# Altium PCB Altium_v0.6.2.PcbDoc
Units mil, origin at the board's own origin, x right, y up, seen from the top; angles counter-clockwise.
Board outline 1968.5 x 1968.5 mil, 2 copper layers (Top Layer, Bottom Layer); 29 components, 47 nets, 200 pads, 32 vias.
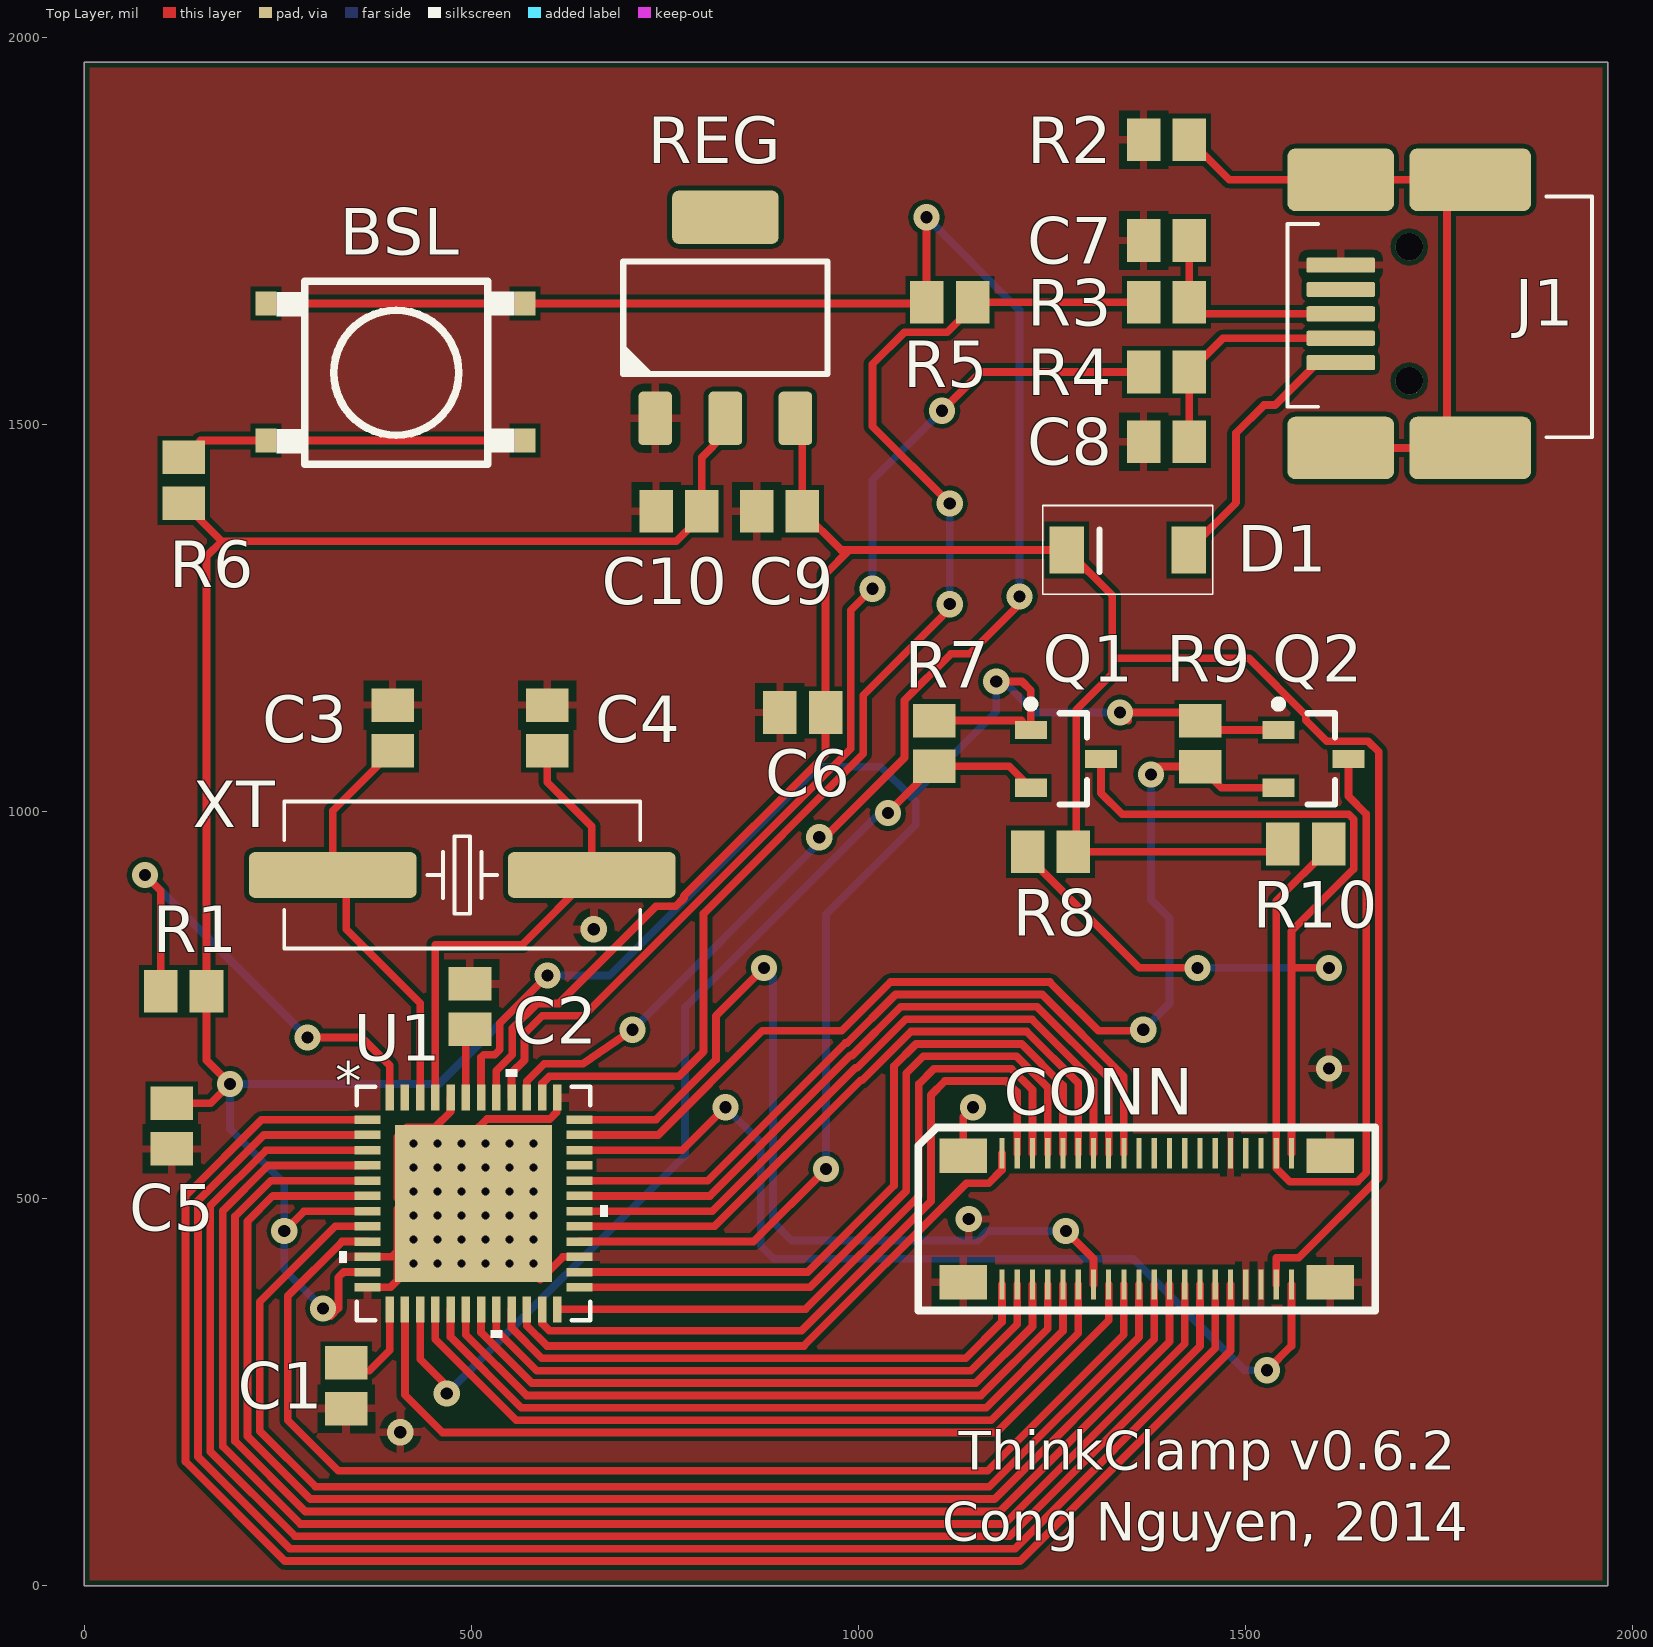
[diagram p0: Top Layer view]
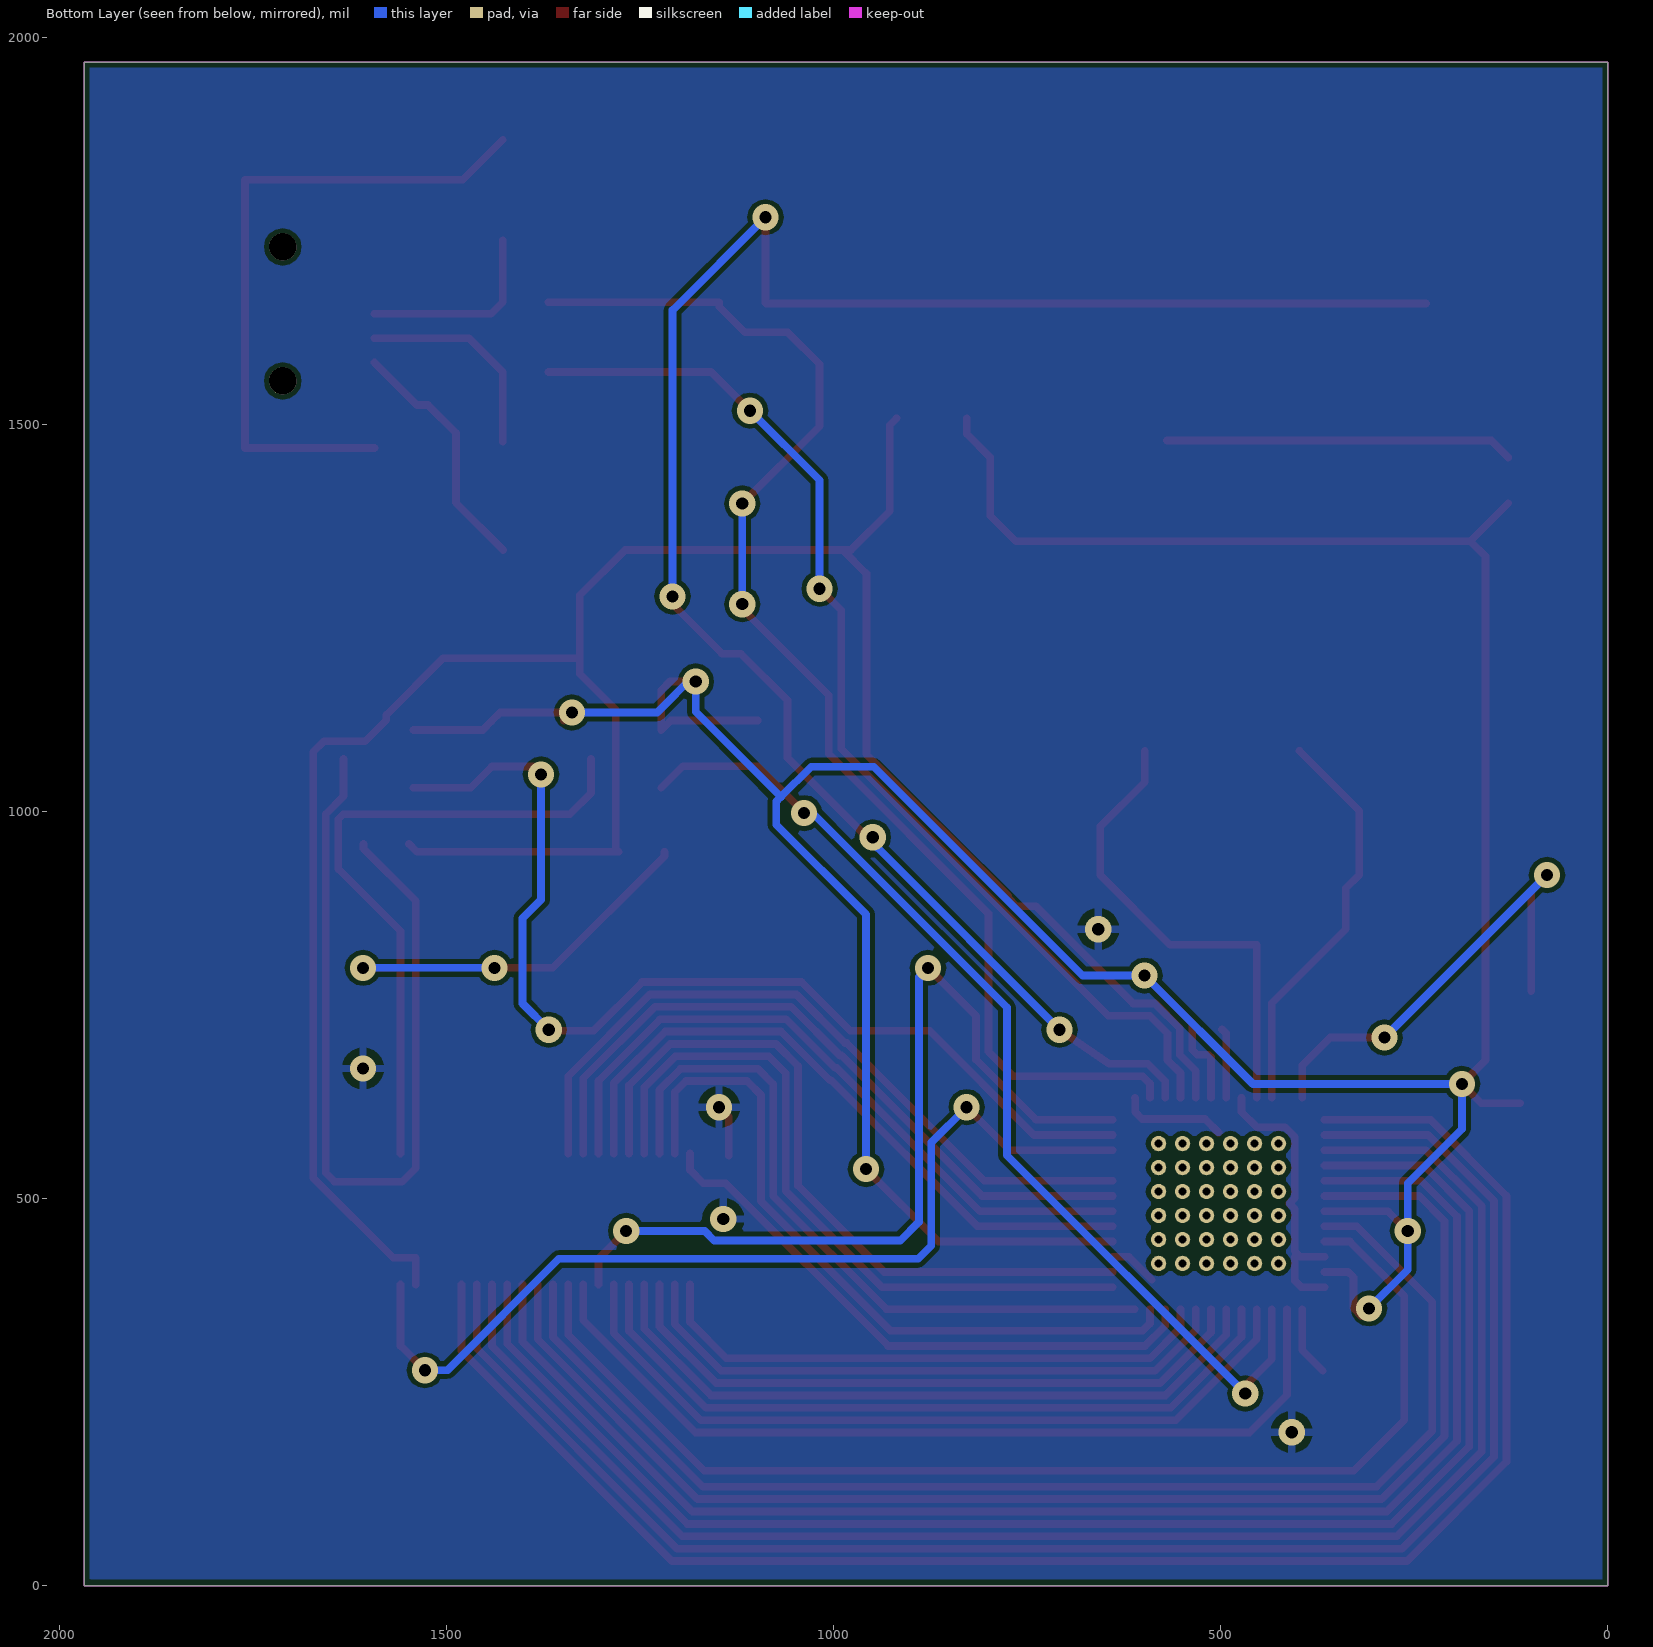
[diagram p1: Bottom Layer view, seen from below]

## Layer stack, top to bottom
Top Layer: signal copper 1.4
Dielectric: dielectric 12.6, FR-4, Dk 4.8
Bottom Layer: signal copper 1.4

## Board outline
0,0 1968.5,0 1968.5,1968.5 0,1968.5 0,0

## Design rules (kind name [scope] priority, off if disabled: settings)
Clearance 5502 [InComponent('U1') vs InComponent('U1')] p1: gap=4
Clearance [All] p2: gap=6
PolygonConnect [All] p1: connectstyle=Relief reliefconductorwidth=10 reliefentries=4 polygonreliefangle="90 Angle" airgapwidth=10
RoutingVias [All] p1: holewidth=28 width=50 viastyle="Through Hole" minholewidth=28 minwidth=50 maxholewidth=28 maxwidth=50
SolderMaskExpansion [All] p1: expansion=4
Width [All] p1: maxlimit=12 minlimit=6 preferedwidth=8
28 further rules are at their usual default settings.

## Components (designator, comment, footprint, x,y, rotation, side; value= is the part's Value field where it differs from the comment)
BSL "TL3301" TL3301 388.35,1568.35 r0 top
C1 "Cap" C0805 338.35,258.35 r270 top
C2 "Cap" C0805 498.35,748.35 r270 top
C3 "Cap" C0805 398.35,1108.35 r270 top
C4 "Cap" C0805 598.35,1108.35 r90 top
C5 "Cap" C0805 112.85,593.85 r90 top
C6 "Cap" C0805 928.35,1128.35 r0 top
C7 "Cap" C0805 1398.35,1738.35 r0 top
C8 "Cap" C0805 1398.35,1478.35 r0 top
C9 "Cap" C0805 898.35,1388.35 r0 top
C10 "Cap" C0805 768.35,1388.35 r0 top
CONN "AA01B-S040VA1" AA01B-S040VA1 1372.85,473.85 r0 top
D1 "B140-13-F" SMA 1348.35,1338.35 r180 top
J1 "USB_MINI_5P" USB_Mini-B_Molex_SMT 1948.35,1838.35 r180 top
Q1 "BSS138N" INF-PG-SOT23_N 1268.35,1068.35 r0 top
Q2 "BSS138N" INF-PG-SOT23_N 1588.35,1068.35 r0 top
R1 "Res1" C0805 128.35,768.35 r0 top
R2 "Res1" C0805 1398.35,1868.35 r180 top
R3 "Res1" C0805 1398.35,1658.35 r0 top
R4 "Res1" C0805 1398.35,1568.35 r0 top
R5 "Res1" C0805 1118.35,1658.35 r0 top
R6 "Res1" C0805 128.35,1428.35 r90 top
R7 "Res1" C0805 1098.35,1088.35 r90 top
R8 "Res1" C0805 1248.35,948.35 r0 top
R9 "Res1" C0805 1441.91,1087.94 r90 top
R10 "Res1" C0805 1578.35,958.35 r180 top
REG "RT9164A LDO" SOT223 828.35,1638.35 r90 top
U1 "MSP430F5502IRGZR" RGZ48_5P15X5P15 502.85,493.85 r0 top
XT "4.00MHz" CRYSTAL_HC49-US-SM 488.35,918.35 r180 top

## Footprints (in the part's own frame and the unit in brackets; to place one, negate y for a bottom-side part, rotate by r counter-clockwise, add the part's x,y. Pads: shape width x height; smd on the part's side, far side on the other; paste and mask are expansions set on the pad)
AA01B-S040VA1 [mm]
  rect 0.17x1 smd: 1(-4.75,2.15) 2(-4.75,-2.15) 3(-4.25,2.15) 4(-4.25,-2.15) 5(-3.75,2.15) 6(-3.75,-2.15) 7(-3.25,2.15) 8(-3.25,-2.15) 9(-2.75,2.15) 10(-2.75,-2.15) 11(-2.25,2.15) 12(-2.25,-2.15) 13(-1.75,2.15) 14(-1.75,-2.15) 15(-1.25,2.15) 16(-1.25,-2.15) 17(-0.75,2.15) 18(-0.75,-2.15) 19(-0.25,2.15) 20(-0.25,-2.15) 21(0.25,2.15) 22(0.25,-2.15) 23(0.75,2.15) 24(0.75,-2.15) 25(1.25,2.15) 26(1.25,-2.15) 27(1.75,2.15) 28(1.75,-2.15) 29(2.25,2.15) 30(2.25,-2.15) 31(2.75,2.15) 32(2.75,-2.15) 33(3.25,2.15) 34(3.25,-2.15) 35(3.75,2.15) 36(3.75,-2.15) 37(4.25,2.15) 38(4.25,-2.15) 39(4.75,2.15) 40(4.75,-2.15)
  rect 1.55x1.14 smd: 41(-6.025,2.075) 42(-6.025,-2.075) 43(6.025,2.075) 44(6.025,-2.075)
  silkscreen extent -7.5,-3 7.5,3
C0805 [mm] "Chip Capacitor, Body 2.0x1.3mm, IPC High Density"
  rect 1.1x1.4 smd: 1(-0.75,0) 2(0.75,0)
  body extent -1.1,-0.72 1.1,0.72, height 1.4
CRYSTAL_HC49-US-SM [mm] "SMD Crystal HC49/US-SM package"
  round 0.508 on Mech15: 0(0,0)
  rrect25% 5.5x1.5 smd: 1(-4.25,0) 2(4.25,0)
  silkscreen extent -5.84,-2.41 5.84,2.41, body extent -6.4,-2.41 6.4,2.42, height 4.29
INF-PG-SOT23_N [mm] "SOT23, 3-Leads, Body 2.9x1.3mm, Pitch 0.95mm, IPC Medium Density"
  rect 1.05x0.6 smd: 1(-1.15,0.95) 2(-1.15,-0.95) 3(1.15,0)
  silkscreen extent -1.27,-1.5 0.7,1.92, body extent -0.7,-1.5 0.7,1.5, height 1.1
RGZ48_5P15X5P15 [mil]
  rect 33.46x11.02 smd paste-5.51: 1(-136.81,108.27) 2(-136.81,88.58) 3(-136.81,68.9) 4(-136.81,49.21) 5(-136.81,29.53) 6(-136.81,9.84) 7(-136.81,-9.84) 8(-136.81,-29.53) 9(-136.81,-49.21) 10(-136.81,-68.9) 11(-136.81,-88.58) 12(-136.81,-108.27) 25(136.81,-108.27) 26(136.81,-88.58) 27(136.81,-68.9) 28(136.81,-49.21) 29(136.81,-29.53) 30(136.81,-9.84) 31(136.81,9.84) 32(136.81,29.53) 33(136.81,49.21) 34(136.81,68.9) 35(136.81,88.58) 36(136.81,108.27)
  rect 11.02x33.46 smd paste-5.51: 13(-108.3,-136.81) 14(-88.61,-136.81) 15(-68.91,-136.81) 16(-49.22,-136.81) 17(-29.53,-136.81) 18(-9.84,-136.81) 19(9.84,-136.81) 20(29.53,-136.81) 21(49.22,-136.81) 22(68.91,-136.81) 23(88.61,-136.81) 24(108.3,-136.81) 37(108.3,136.81) 38(88.61,136.81) 39(68.91,136.81) 40(49.22,136.81) 41(29.53,136.81) 42(9.84,136.81) 43(-9.84,136.81) 44(-29.53,136.81) 45(-49.22,136.81) 46(-68.91,136.81) 47(-88.61,136.81) 48(-108.3,136.81)
  rect 202.76x202.76 smd paste-100.88 mask-101: 49(0,0)
  round 20 / inner round 60 / far side round 20 hole 10: V(77.5,77.5) V_2(-77.5,-46.5) V_3(-77.5,-77.5) V_4(-77.5,-15.5) V_5(-77.5,15.5) V_6(-77.5,46.5) V_7(-77.5,77.5) V_8(-46.5,-77.5) V_9(-46.5,-46.5) V_10(-46.5,-15.5) V_11(-46.5,15.5) V_12(-46.5,46.5) V_13(-46.5,77.5) V_14(-15.5,-77.5) V_15(-15.5,-46.5) V_16(-15.5,-15.5) V_17(-15.5,15.5) V_18(-15.5,46.5) V_19(-15.5,77.5) V_20(15.5,-77.5) V_21(15.5,-46.5) V_22(15.5,-15.5) V_23(15.5,15.5) V_24(15.5,46.5) V_25(15.5,77.5) V_26(46.5,-77.5) V_27(46.5,-46.5) V_28(46.5,-15.5) V_29(46.5,15.5) V_30(46.5,46.5) V_31(46.5,77.5) V_32(77.5,-77.5) V_33(77.5,-46.5) V_34(77.5,-15.5) V_35(77.5,15.5) V_36(77.5,46.5)
  silkscreen extent -174,-174 174,174
SMA [mm]
  rect 1.14x1.55 smd: 1(-2,0) 2(2,0)
  silkscreen extent -2.8,-1.46 2.8,1.46
SOT223 [mm] "SOT223 /SC-73"
  round 1 on Mech15: 0(0,0)
  rrect25% 1.75x1.1 smd: 1(-3.3,2.3) 2(-3.3,0) 3(-3.3,-2.3)
  rrect25% 1.75x3.5 smd: 4(3.3,0)
  silkscreen extent -1.85,-3.35 1.85,3.35, body extent -3.65,-3.35 3.65,3.35, height 1.8
TL3301 [mm] "TL3301, Tactile switch"
  rect 0.7x0.8 smd: 1(-3.9,2.25) 2(4.6,2.25) 3(-3.9,-2.25) 4(4.6,-2.25)
  silkscreen extent -3.55,-3.02 4.25,2.98
USB_Mini-B_Molex_SMT [mm]
  rrect25% 2.25x0.5 smd: 1(8.25,6.55) 2(8.25,5.75) 3(8.25,4.95) 4(8.25,4.15) 5(8.25,3.35)
  round 0.9 hole 0.9 unplated: H1(6,7.15) H2(6,2.75)
  rrect25% 4x2.05 smd: MH1(4,0.55) MH4(4,9.35)
  rrect25% 3.5x2.05 smd: MH2(8.25,0.55) MH3(8.25,9.35)
  silkscreen extent 0,1.1 10,9, body extent 0,1.1 9,9, height 3.95

## Part data
BSL: "TL3301, tactile switch, gull wing termination"
C1 C2 C3 C4 C5 C6 C7 C8 C9 C10: "Capacitor"
CONN: "AA01B-S040VA1, LAPTOP KEYBOARD RECEPTACLE"
D1: "B140-13-F, Schottky Diode"
J1: "Mini USB Connector"
Q1 Q2: "N-Channel SIPMOS Small-Signal-Transistor, 60 V VDS, 0.23 A ID, -55 to 150 degC, PG-SOT23, Reel, Green"
R1 R2 R3 R4 R5 R6 R7 R8 R9 R10: "Resistor"
REG: "RT9164-33[P/G]G, 3.3V, LDO"
U1: library part MSP430F5502_RGZ_, "MSP430F5502"
XT: library part Crystal_6MHz_HC49/US, "Resonator Ceramic 6.00 MHz 30ppm"

## Via types
v1: diameter 33.86, hole 15.75, Top Layer to Bottom Layer, 32 vias

## Nets (pads, with @x,y where several pads share a name; then routed paths per layer and width w, separated by ;. In a path a pad name is that pad's centre, name@x,y a point inside that pad or via, vN(x,y) a via of type N, cw(c..) or ccw(c..) an arc to the next point about the centre after c; other vN are vias at no path point)
+5: C6.2 C9.2 CONN.38 D1.2 R8.2 R10.2 REG.3 U1.41 | length 3282.9
  Top Layer w10: U1.41 532.38,665.46 552.91,685.98 552.91,720.28 584.97,752.35 613.26,752.35 738.73,877.82 764.17,877.82 774.94,888.59 774.94,891.32 957.87,1074.26 C6.2 957.87,1307.87 988.35,1338.35 ; REG.3 927.87,1499.45 C9.2 977.87,1338.35 988.35,1338.35 ; CONN.38 1540.17,423.68 1569.33,423.68 1672.53,526.88 1672.53,1077.48 1658.85,1091.16 1605.58,1091.16 ; R10.2 1538.82,948.35 R8.2 1281.95,952.43 1281.95,1131.95 1328.35,1178.35 1328.35,1198.35 ; 1605.56,1091.13 1578.35,1118.35 1578.35,1124.95 1504.95,1198.35 1328.35,1198.35 ; 988.35,1338.35 D1.2 1328.35,1279.61 1328.35,1198.35
C0: CONN.22 U1.6 | length 1808.3
  Top Layer w10: U1.6 243.69,503.69 210.85,470.85 210.85,193.22 292.22,111.85 1176.1,111.85 1382.69,318.43 CONN.22
C1: CONN.18 U1.9 | length 1538.2
  Top Layer w10: U1.9 333.12,444.63 262.85,374.36 262.85,213.85 328.35,148.35 1167.35,148.35 1343.32,324.32 CONN.18
C2: CONN.14 U1.36 | length 1163.6
  Top Layer w10: U1.36 738.58,602.11 816.12,679.66 816.12,736.12 v1(878.35,798.35) ; v1(1268.35,458.35) 1303.95,422.74 CONN.14
  Bottom Layer w10: v1(878.35,798.35) 890,786.69 890,470 914.08,445.92 1154.41,445.92 1166.84,458.35 v1(1268.35,458.35)
C3: CONN.10 U1.17 | length 966.1
  Top Layer w10: U1.17 473.31,321.3 564.77,229.85 1165.34,229.85 1264.58,329.09 CONN.10
C4: CONN.2 U1.21 | length 741.8
  Top Layer w10: U1.21 552.07,333.05 591.28,293.85 1138.83,293.85 1185.84,340.85 CONN.2
C5: CONN.4 U1.20 | length 797.9
  Top Layer w10: U1.20 532.38,330.11 584.65,277.85 1145.46,277.85 1205.52,337.91 CONN.4
C6: CONN.8 U1.18 | length 910
  Top Layer w10: U1.18 493,324.24 571.39,245.85 1158.71,245.85 1244.89,332.03 CONN.8
C7: CONN.12 U1.16 | length 1022.2
  Top Layer w10: U1.16 453.62,318.36 558.14,213.85 1171.97,213.85 1284.26,326.14 CONN.12
C8: CONN.6 U1.19 | length 854
  Top Layer w10: U1.19 512.69,327.18 578.02,261.85 1152.09,261.85 1225.21,334.97 CONN.6
C9: CONN.20 U1.8 | length 1660.5
  Top Layer w10: U1.8 324.32,464.32 226.85,366.85 226.85,199.85 298.85,127.85 1169.47,127.85 1363,321.38 CONN.20
C10: CONN.16 U1.14 | length 1146.4
  Top Layer w10: U1.14 414.24,246.59 462.99,197.85 1178.6,197.85 1323.63,342.89 CONN.16
C11: CONN.24 U1.5 | length 1890.9
  Top Layer w10: U1.5 240.75,523.37 194.85,477.47 194.85,186.59 285.59,95.85 1182.73,95.85 1402.37,315.49 CONN.24
C12: CONN.28 U1.3 | length 2056.1
  Top Layer w10: U1.3 234.86,562.74 162.85,490.73 162.85,173.34 272.34,63.85 1195.98,63.85 1441.74,309.61 CONN.28
C13: CONN.32 U1.1 | length 2221.2
  Top Layer w10: U1.1 228.98,602.11 130.85,503.98 130.85,160.08 259.08,31.85 1209.24,31.85 1481.11,303.72 CONN.32
C14: CONN.26 U1.4 | length 1973.5
  Top Layer w10: U1.4 237.8,543.06 178.85,484.1 178.85,179.96 278.96,79.85 1189.36,79.85 1422.06,312.55 CONN.26
C15: CONN.30 U1.2 | length 2138.6
  Top Layer w10: U1.2 231.92,582.43 146.85,497.36 146.85,166.71 265.71,47.85 1202.61,47.85 1461.43,306.66 CONN.30
CLOCK_3.3: Q1.2 R7.1 U1.15 | length 1337
  Top Layer w10: U1.15 433.93,292.76 468.35,258.35 v1(468.35,248.35) ; v1(1038.35,998.35) 1038.35,998.82 R7.1 1195.2,1058.82 Q1.2
  Bottom Layer w10: v1(468.35,248.35) 776.35,556.35 776.35,747.26 1027.43,998.35 v1(1038.35,998.35)
CLOCK_5: CONN.39 Q1.3 R8.1 | length 1354.5
  Top Layer w10: R8.1@1218.35,947.87 R8.1 1218.82,942.63 1363.11,798.35 v1(1438.35,798.35) ; Q1.3 1313.62,1024.35 1341.07,996.91 1634.08,996.91 1640.53,990.46 1640.53,926.23 1559.85,845.56 1559.85,798.35 ; CONN.39 1559.85,798.35 ; v1(1608.35,798.35) 1559.85,798.35
  Bottom Layer w10: v1(1438.35,798.35) v1(1608.35,798.35)
DATA_3.3: Q2.2 R9.1 U1.35 | length 1371.3
  Top Layer w10: U1.35 741.52,582.43 876.27,717.18 978.79,717.18 1041.61,780 1247.71,780 1310.53,717.18 1367.18,717.18 v1(1368.35,718.35) ; v1(1378.35,1048.35) 1388.41,1058.41 R9.1 1469.37,1030.95 Q2.2
  Bottom Layer w10: v1(1368.35,718.35) 1402.35,752.35 1402.35,862.35 1378.35,886.35 v1(1378.35,1048.35)
DATA_5: CONN.37 Q2.3 R10.1 | length 1119.5
  Top Layer w10: R10.1 1607.87,952.63 1540.17,884.93 CONN.37 1540.17,539.59 1557.66,522.1 1645.12,522.1 1656.53,533.51 1656.53,997.09 1633.62,1019.99 Q2.3
DM: R4.1 U1.40 | length 1430.8
  Top Layer w10: U1.40 552.07,662.52 568.91,679.35 568.91,713.65 591.6,736.35 645.32,736.35 990.53,1081.55 990.53,1260.53 v1(1018.35,1288.35) ; v1(1108.35,1518.35) 1158.35,1568.35 R4.1
  Bottom Layer w10: v1(1018.35,1288.35) 1018.35,1428.35 v1(1108.35,1518.35)
DP: R3.1 R5.2 U1.38 | length 1692.3
  Top Layer w10: U1.38 591.45,648.77 601.07,658.39 768.39,658.39 800.12,690.12 800.12,868.52 1006.53,1074.92 1006.53,1150.53 1118.35,1262.35 v1(1118.35,1268.35) ; v1(1118.35,1398.35) 1018.35,1498.35 1018.35,1578.35 1059.79,1619.79 1115.03,1619.79 1147.87,1652.63 R5.2 R3.1
  Bottom Layer w10: v1(1118.35,1268.35) v1(1118.35,1398.35)
FN: CONN.1 U1.22 | length 761.4
  Top Layer w10: U1.22 571.76,335.99 597.9,309.85 929.85,309.85 1140,520 1168.61,520 1185.84,537.23 CONN.1
GND: C1.2 C2.1 C3.1 C4.2 C5.1 C6.1 C7.1 C8.1 C9.1 C10.1 CONN.31 CONN.34 CONN.36 CONN.41 CONN.42 CONN.43 CONN.44 J1.5 R2.2 REG.1 U1.10 U1.12 U1.27 U1.37 U1.44 U1.49 | length 636.5
  Top Layer w10: U1.12 395.58,385.58 404.35,394.35 U1.49@404.35,424.95 ; U1.10 397.17,424.95 404.35,432.12 404.35,487.04 411.15,493.85 404.35,500.65 404.35,580.04 416.65,592.35 453.11,592.35 473.31,612.55 U1.44 ; U1.49@502.85,585.54 520.23,602.93 601.52,602.93 610.63,612.04 610.63,630.15 U1.37 ; U1.49@589.04,395.35 618.65,424.95 U1.27 ; CONN.41 1135.64,605.64 v1(1148.35,618.35)
  other v1: 408.35,198.35 1142.85,473.85 1608.35,668.35 658.35,848.35
NetBSL_3: BSL.3 BSL.4 R6.2 | length 450.2
  Top Layer w10: R6.2 150.24,1479.76 BSL.3 BSL.4
NetC1_1: C1.1 U1.13 | length 90
  Top Layer w10: 368.35,277.87 394.55,304.08 U1.13
NetC7_2: C7.2 J1.3 R3.2 | length 251.8
  Top Layer w10: C7.2 R3.2 1442.76,1643.46 J1.3@1593.54,1643.46
NetC8_2: C8.2 J1.2 R4.2 | length 273.7
  Top Layer w10: C8.2 R4.2 1471.5,1611.97 J1.2@1593.54,1611.97
NetD1_1: D1.1 J1.1 | length 319.5
  Top Layer w10: D1.1 1488.35,1399.61 1488.35,1489.59 1524.34,1525.59 1538.66,1525.59 J1.1@1593.54,1580.47
NetJ1_MH1: J1.MH1 J1.MH2 J1.MH3 J1.MH4 R2.1 | length 868.2
  Top Layer w10: R2.1 1479.53,1816.69 1593.54,1816.69 1760.87,1816.69 1760.87,1470.24 J1.MH3@1593.54,1470.24
PUR: BSL.1 BSL.2 R5.1 U1.39 | length 2483
  Top Layer w10: BSL.1 BSL.2 1087.4,1656.93 1088.35,1657.87 v1(1088.35,1768.35) ; U1.39 571.76,651.71 594.45,674.39 644.39,674.39 v1(708.35,718.35) ; v1(949.6,967.09) 957.09,967.09 1059.79,1069.79 1059.79,1144.08 1120.05,1204.35 1144.35,1204.35 1208.35,1268.35 v1(1208.35,1278.35)
  Bottom Layer w10: v1(708.35,718.35) 943.35,953.35 943.35,973.35 v1(949.6,967.09) ; v1(1088.35,1768.35) 1208.35,1648.35 v1(1208.35,1278.35)
R0: CONN.5 U1.24 | length 921.2
  Top Layer w10: U1.24 931.78,357.04 1078.13,503.38 1078.13,648.13 1098,668 1197.99,668 1225.21,640.78 CONN.5
R1: CONN.13 U1.30 | length 894
  Top Layer w10: U1.30 811.38,484 996.55,669.18 998.67,669.18 1061.49,732 1224.5,732 1303.95,652.55 CONN.13
R2: CONN.9 U1.26 | length 947.9
  Top Layer w10: U1.26 934.75,405.26 1046.13,516.64 1046.13,671.38 1074.75,700 1211.24,700 1264.58,646.67 CONN.9
R3: CONN.7 U1.25 | length 919.9
  Top Layer w10: U1.25 937.7,385.58 1062.13,510.01 1062.13,662.13 1084,684 1204.62,684 1244.89,643.72 CONN.7
R4: CONN.11 U1.29 | length 867.5
  Top Layer w10: U1.29 814.32,464.32 1003.18,653.18 1005.3,653.18 1068.12,716 1217.87,716 1284.26,649.61 CONN.11
R5: CONN.3 U1.23 | length 935.5
  Top Layer w10: U1.23 591.45,338.93 601.07,329.3 926.68,329.3 1094.13,496.76 1094.13,634.13 1112,652 1191.36,652 1205.52,637.84 CONN.3
R6: CONN.15 U1.31 | length 920.5
  Top Layer w10: U1.31 808.43,503.69 989.92,685.18 992.04,685.18 1054.86,748 1231.13,748 1323.63,655.49 CONN.15
R7: CONN.17 U1.32 | length 947
  Top Layer w10: U1.32 805.49,523.37 983.3,701.18 985.41,701.18 1048.24,764 1237.75,764 1343.32,658.44 CONN.17
RST: R1.1 U1.48 | length 618.2
  Top Layer w10: v1(78.35,918.35) 98.82,897.87 R1.1 ; v1(288.35,708.35) 358.35,708.35 394.55,672.14 U1.48
  Bottom Layer w10: v1(78.35,918.35) v1(288.35,708.35)
TP_RESEST: CONN.40 U1.34 | length 1254.6
  Top Layer w10: U1.34 772.74,562.74 v1(828.35,618.35) ; v1(1528.35,278.35) 1559.85,309.85 CONN.40
  Bottom Layer w10: v1(828.35,618.35) 874,572.69 874,439.29 890.94,422.35 1355.26,422.35 1499.26,278.35 v1(1528.35,278.35)
TXD: U1.33
V18: C2.2 U1.43 | length 90.4
  Top Layer w10: U1.43 493,713.47 C2.2
VCC: C5.2 C10.2 Q1.1 Q2.1 R1.2 R6.1 R7.2 R9.2 REG.2 U1.7 U1.11 U1.28 U1.42 | length 5217.9
  Top Layer w10: C5.2 163.37,623.37 v1(188.35,648.35) 157.87,678.82 R1.2 157.87,1330.28 177.38,1349.79 ; R6.1 177.38,1349.79 ; v1(258.35,458.35) 284,484 U1.7 ; v1(308.35,358.35) 318.35,348.35 328.35,358.35 328.35,398.35 335.26,405.26 U1.11 ; U1.42 512.69,682.69 516.17,686.17 530.46,686.17 536.91,692.61 536.91,726.91 v1(598.35,788.35) ; U1.28 864.63,444.63 v1(958.35,538.35) ; REG.2 828.35,1488.35 797.87,1457.87 C10.2 797.87,1382.63 765.03,1349.79 177.38,1349.79 ; R7.2 1210.94,1117.87 Q1.1 1223.07,1156.93 1211.65,1168.35 v1(1178.35,1168.35) ; v1@1348.82,1117.87 v1(1338.35,1128.35) 1431.02,1128.35 R9.2 1453.62,1105.75 Q2.1
  Bottom Layer w10: v1(308.35,358.35) 258.35,408.35 v1(258.35,458.35) 258.35,520 188.35,590 v1(188.35,648.35) 458.35,648.35 v1(598.35,788.35) 678.35,788.35 948.35,1058.35 1029.26,1058.35 1068.35,1019.26 ; v1(958.35,538.35) 958.35,867.43 1074.35,983.43 1074.35,1013.26 1068.35,1019.26 ; v1(1338.35,1128.35) 1228.35,1128.35 1178.35,1178.35 v1(1178.35,1168.35) 1178.35,1129.26 1068.35,1019.26
XT2IN: C4.1 U1.45 XT.1 | length 621.2
  Top Layer w10: U1.45 453.62,828.35 565.67,828.35 XT.1 655.67,981.02 598.35,1038.35 C4.1
XT2OUT: C3.2 U1.46 XT.2 | length 527
  Top Layer w10: C3.2 321.02,1001.5 XT.2 338.35,901.02 338.35,848.35 433.93,752.76 U1.46
pads on no net: CONN.19 CONN.21 CONN.23 CONN.25 CONN.27 CONN.29 CONN.33 CONN.35 J1.4 J1.H1 J1.H2 REG.0 REG.4 U1.47 U1.V U1.V_2 U1.V_3 U1.V_4 U1.V_5 U1.V_6 U1.V_7 U1.V_8 U1.V_9 U1.V_10 U1.V_11 U1.V_12 U1.V_13 U1.V_14 U1.V_15 U1.V_16 U1.V_17 U1.V_18 U1.V_19 U1.V_20 U1.V_21 U1.V_22 U1.V_23 U1.V_24 U1.V_25 U1.V_26 U1.V_27 U1.V_28 U1.V_29 U1.V_30 U1.V_31 U1.V_32 U1.V_33 U1.V_34 U1.V_35 U1.V_36 XT.0

## Polygon pours and split planes (outlines as drawn)
GND on Top Layer "TOP GND" (solid, pour order 2): 0,1968.5 0,0 1968.5,0 1968.5,1968.5 0,1968.5
GND on Bottom Layer "BOT GND" (solid, pour order 4): 0,1968.5 0,8.35 1960.16,8.35 1968.5,0 1968.5,1968.5 8.35,1968.5 0,1968.5

## Keep-outs
Keep-Out Layer:
  the board outline again, w1.97

## Silkscreen, mask and mechanical layers (free items; w line width, h text height)
Top Overlay:
  text "ThinkClamp v0.6.2" at 1130,150 h50
  text "Cong Nguyen, 2014" at 1108.35,58.35 h50
Mechanical 13:
  the board outline again, w1.97

## Text inside footprints (layer, text, board x,y; h text height)
U1: Top Overlay "*" at 324.31,626.96 h50; Mechanical 1 "*" at 324.31,626.96 h50